# Altium PCB Печатная плата.PcbDoc
Units mm, origin at the board's own origin, x right, y up, seen from the top; angles counter-clockwise.
Board outline 40 x 40 mm, 4 copper layers (Top Layer 1, 15v, GND, Bottom Layer 1), stack 0.91 mm thick; 3 components, 12 nets, 42 pads, 1 vias.
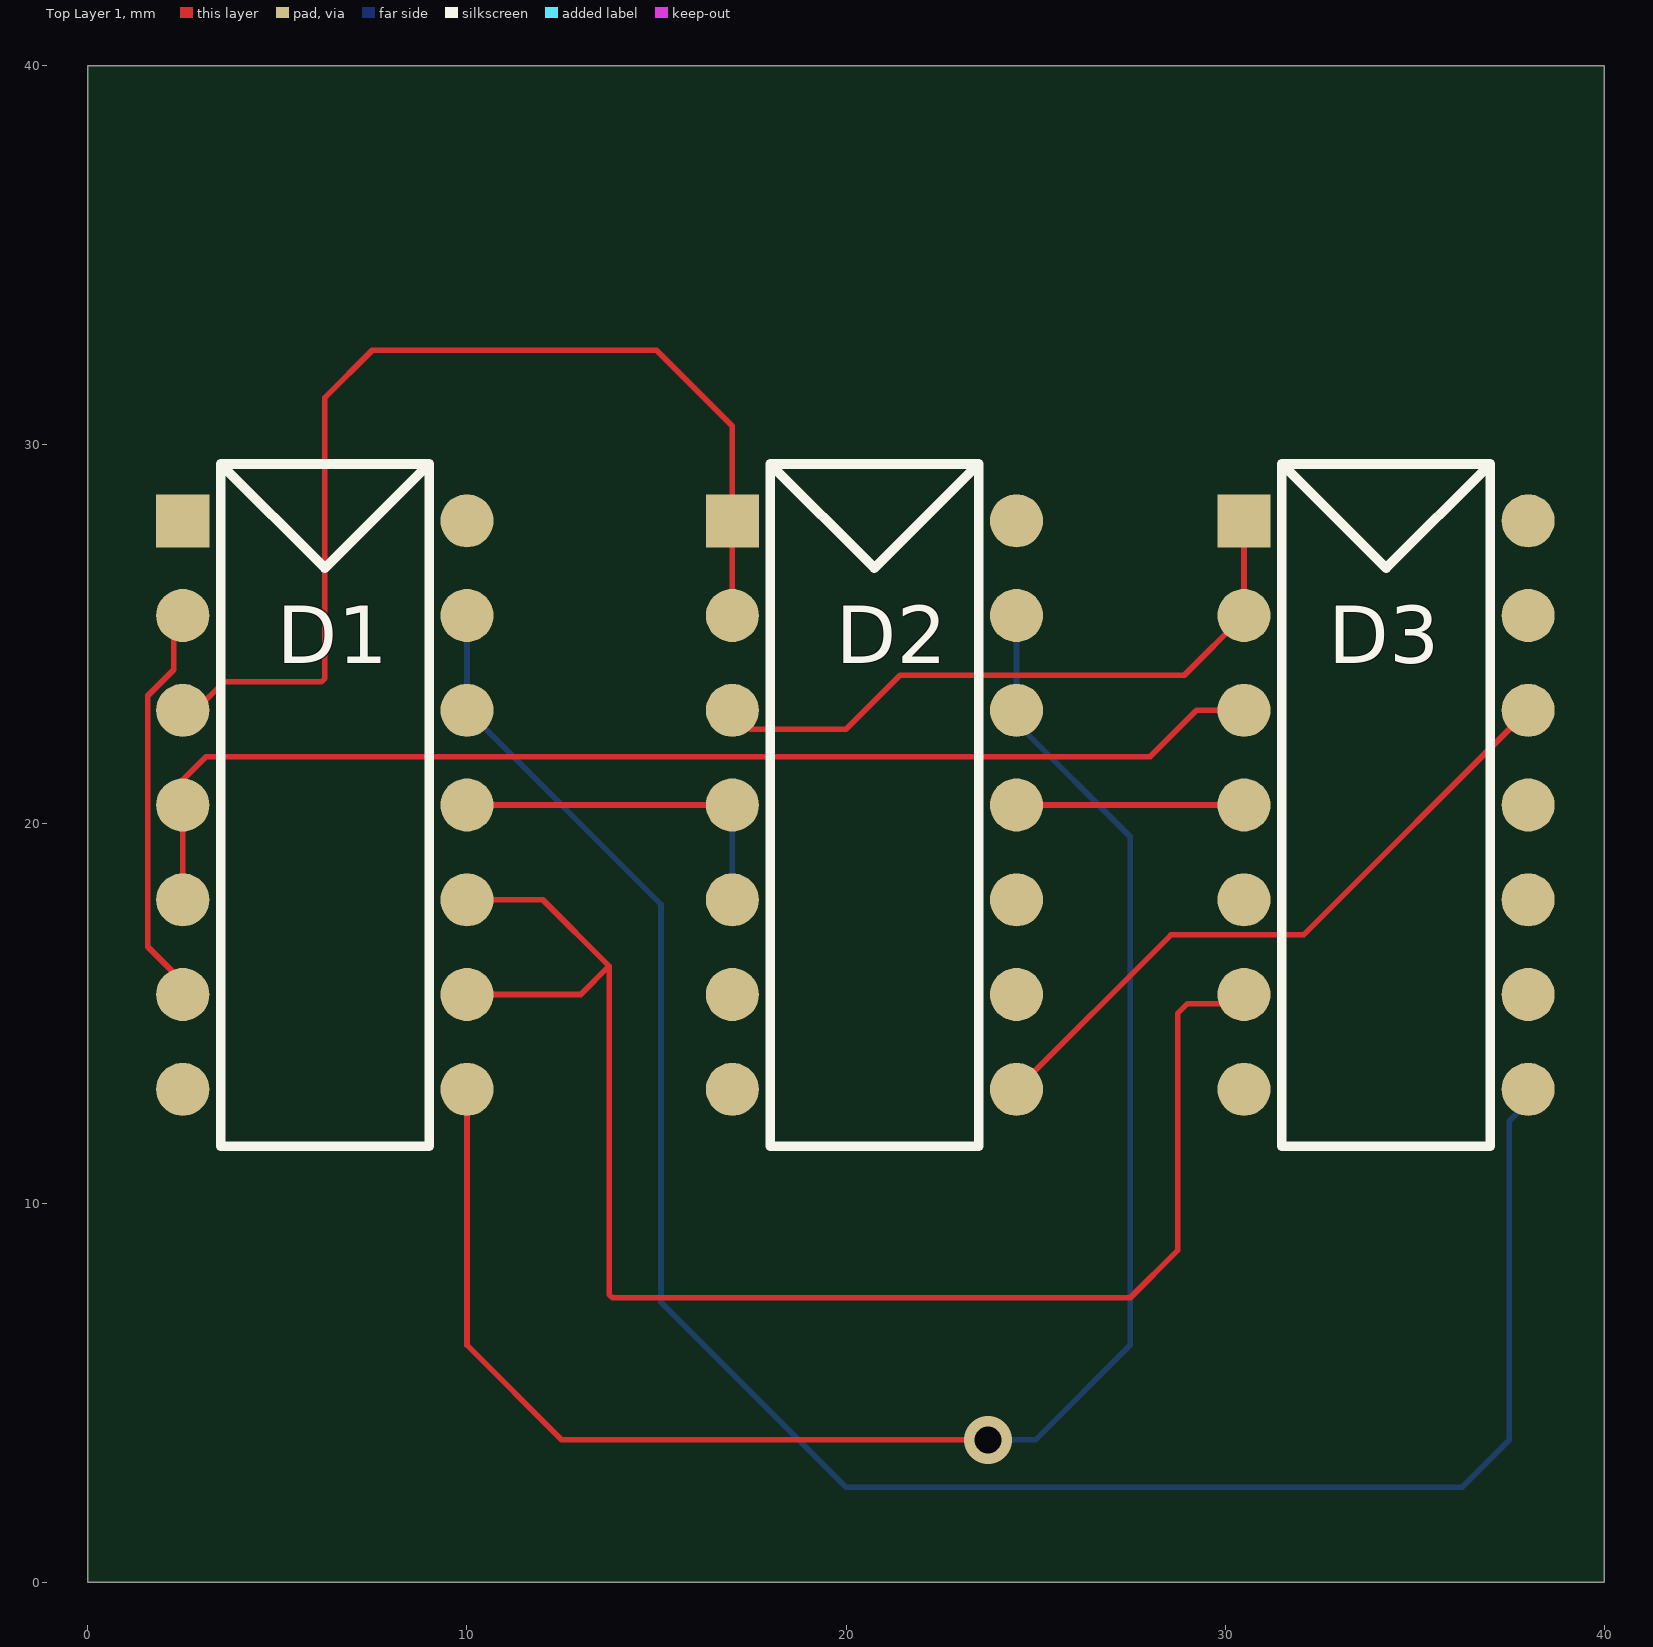
[diagram p0: Top Layer 1 view]
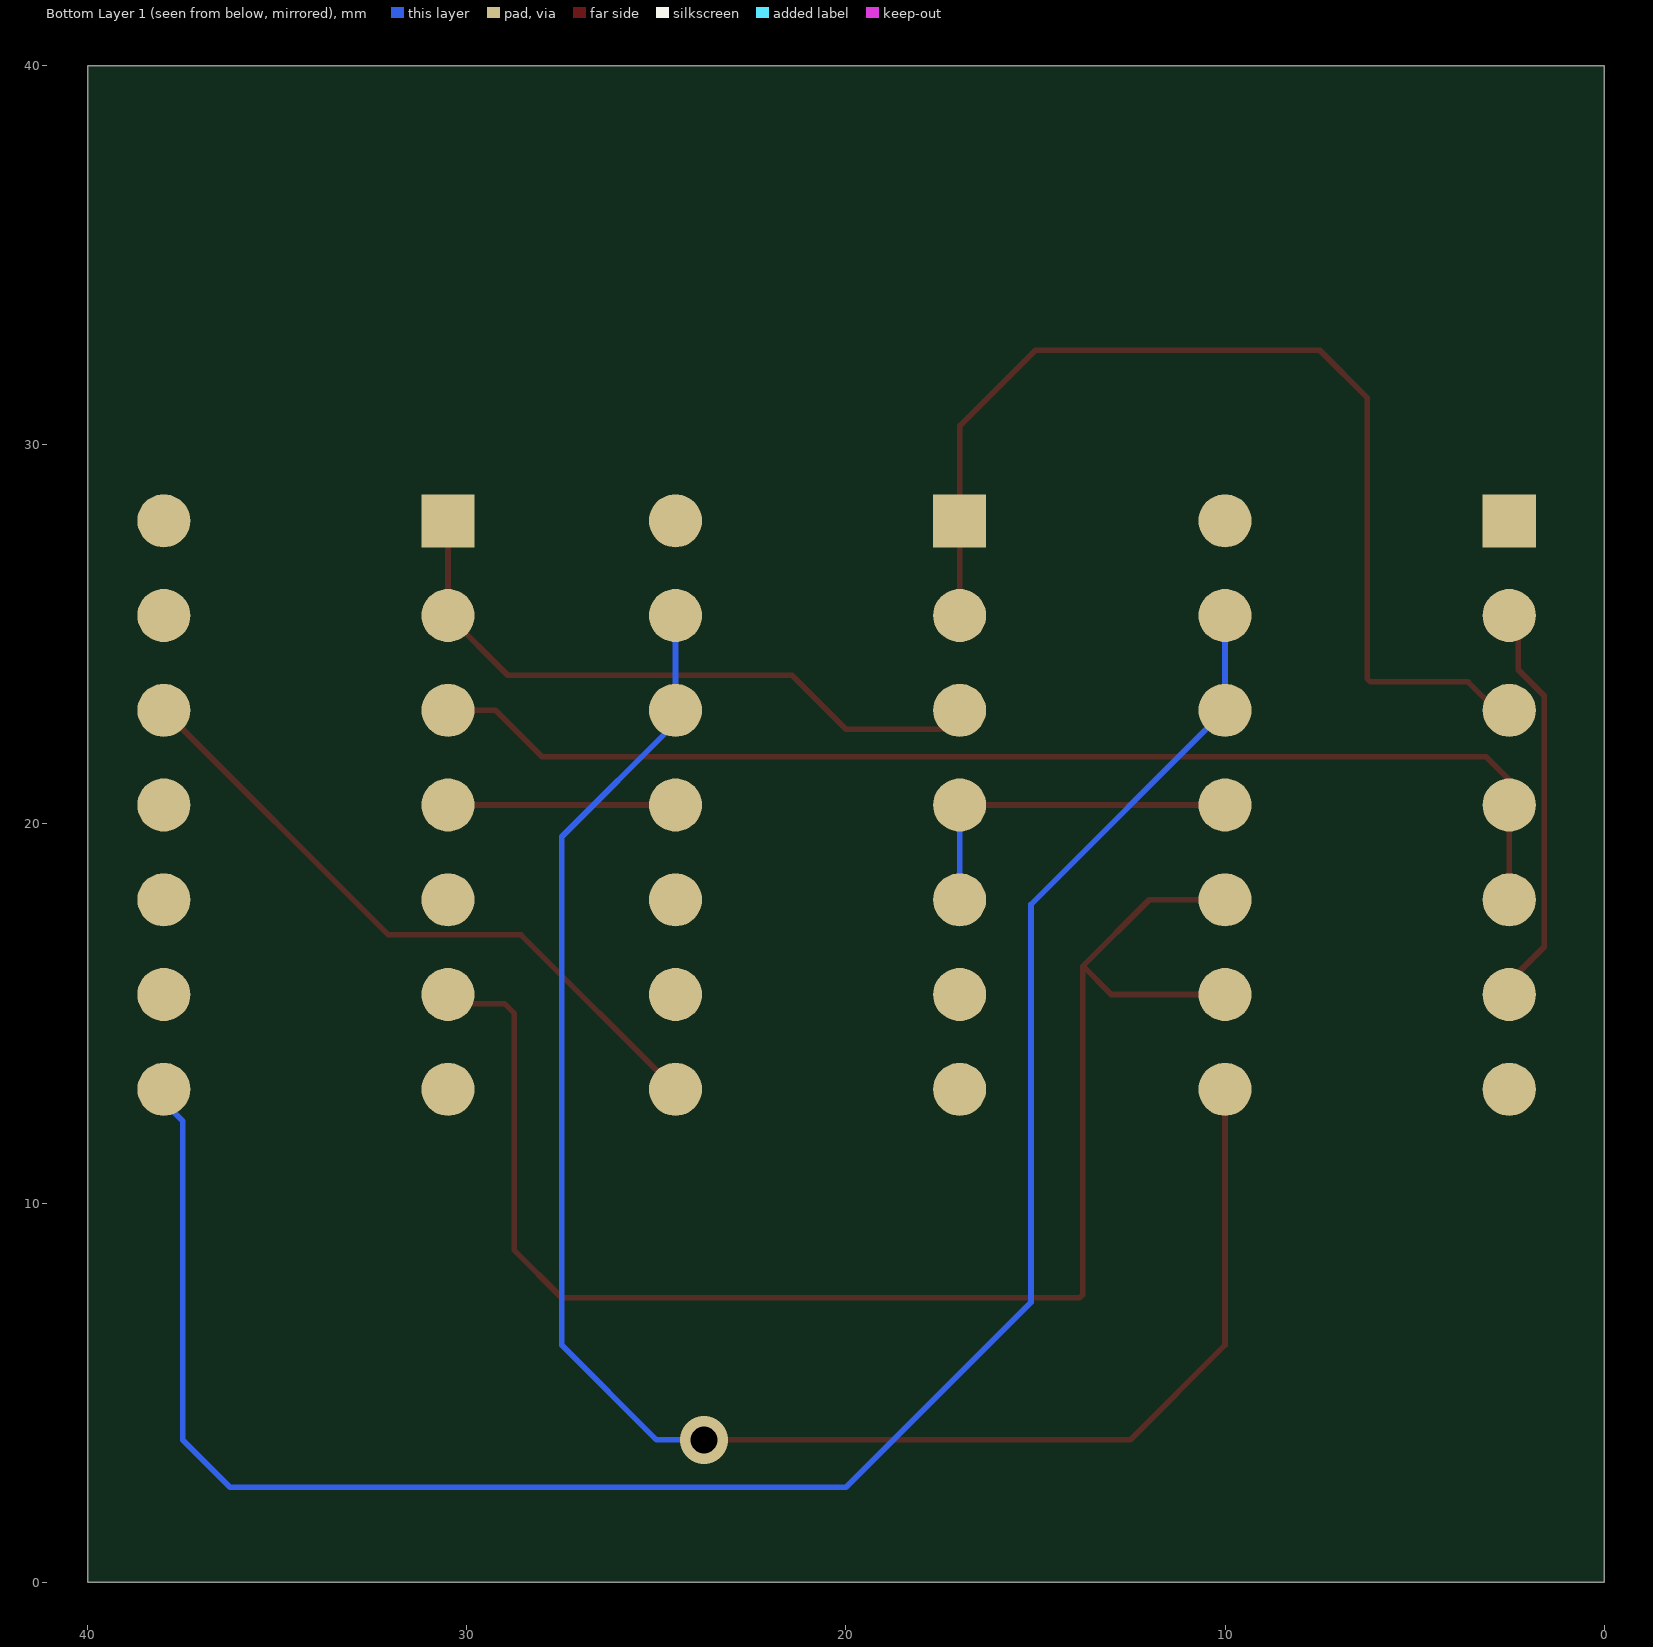
[diagram p1: Bottom Layer 1 view, seen from below]
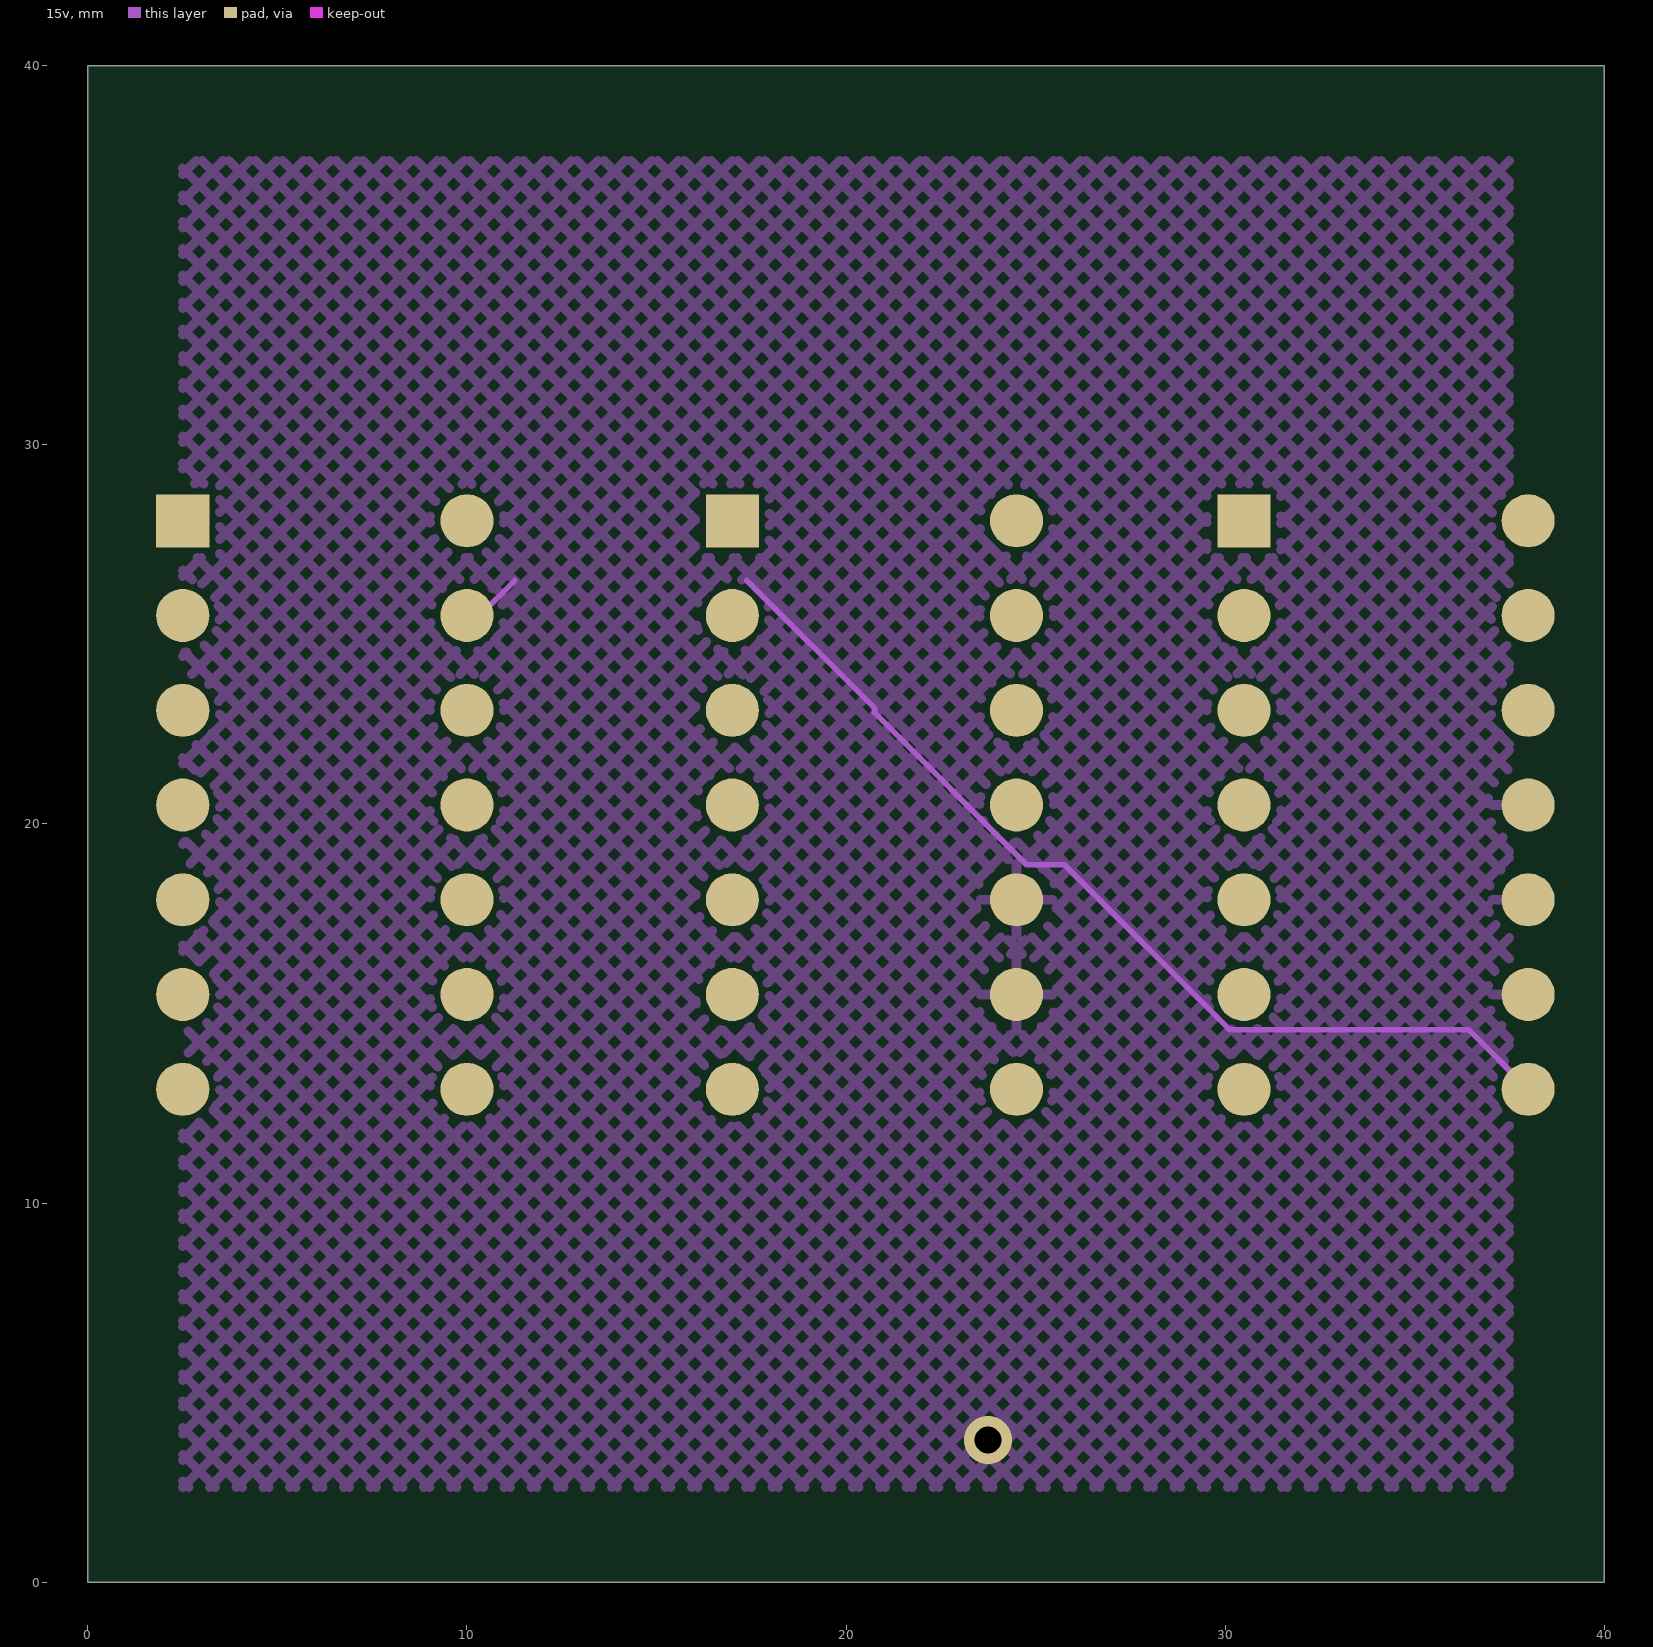
[diagram p2: 15v]
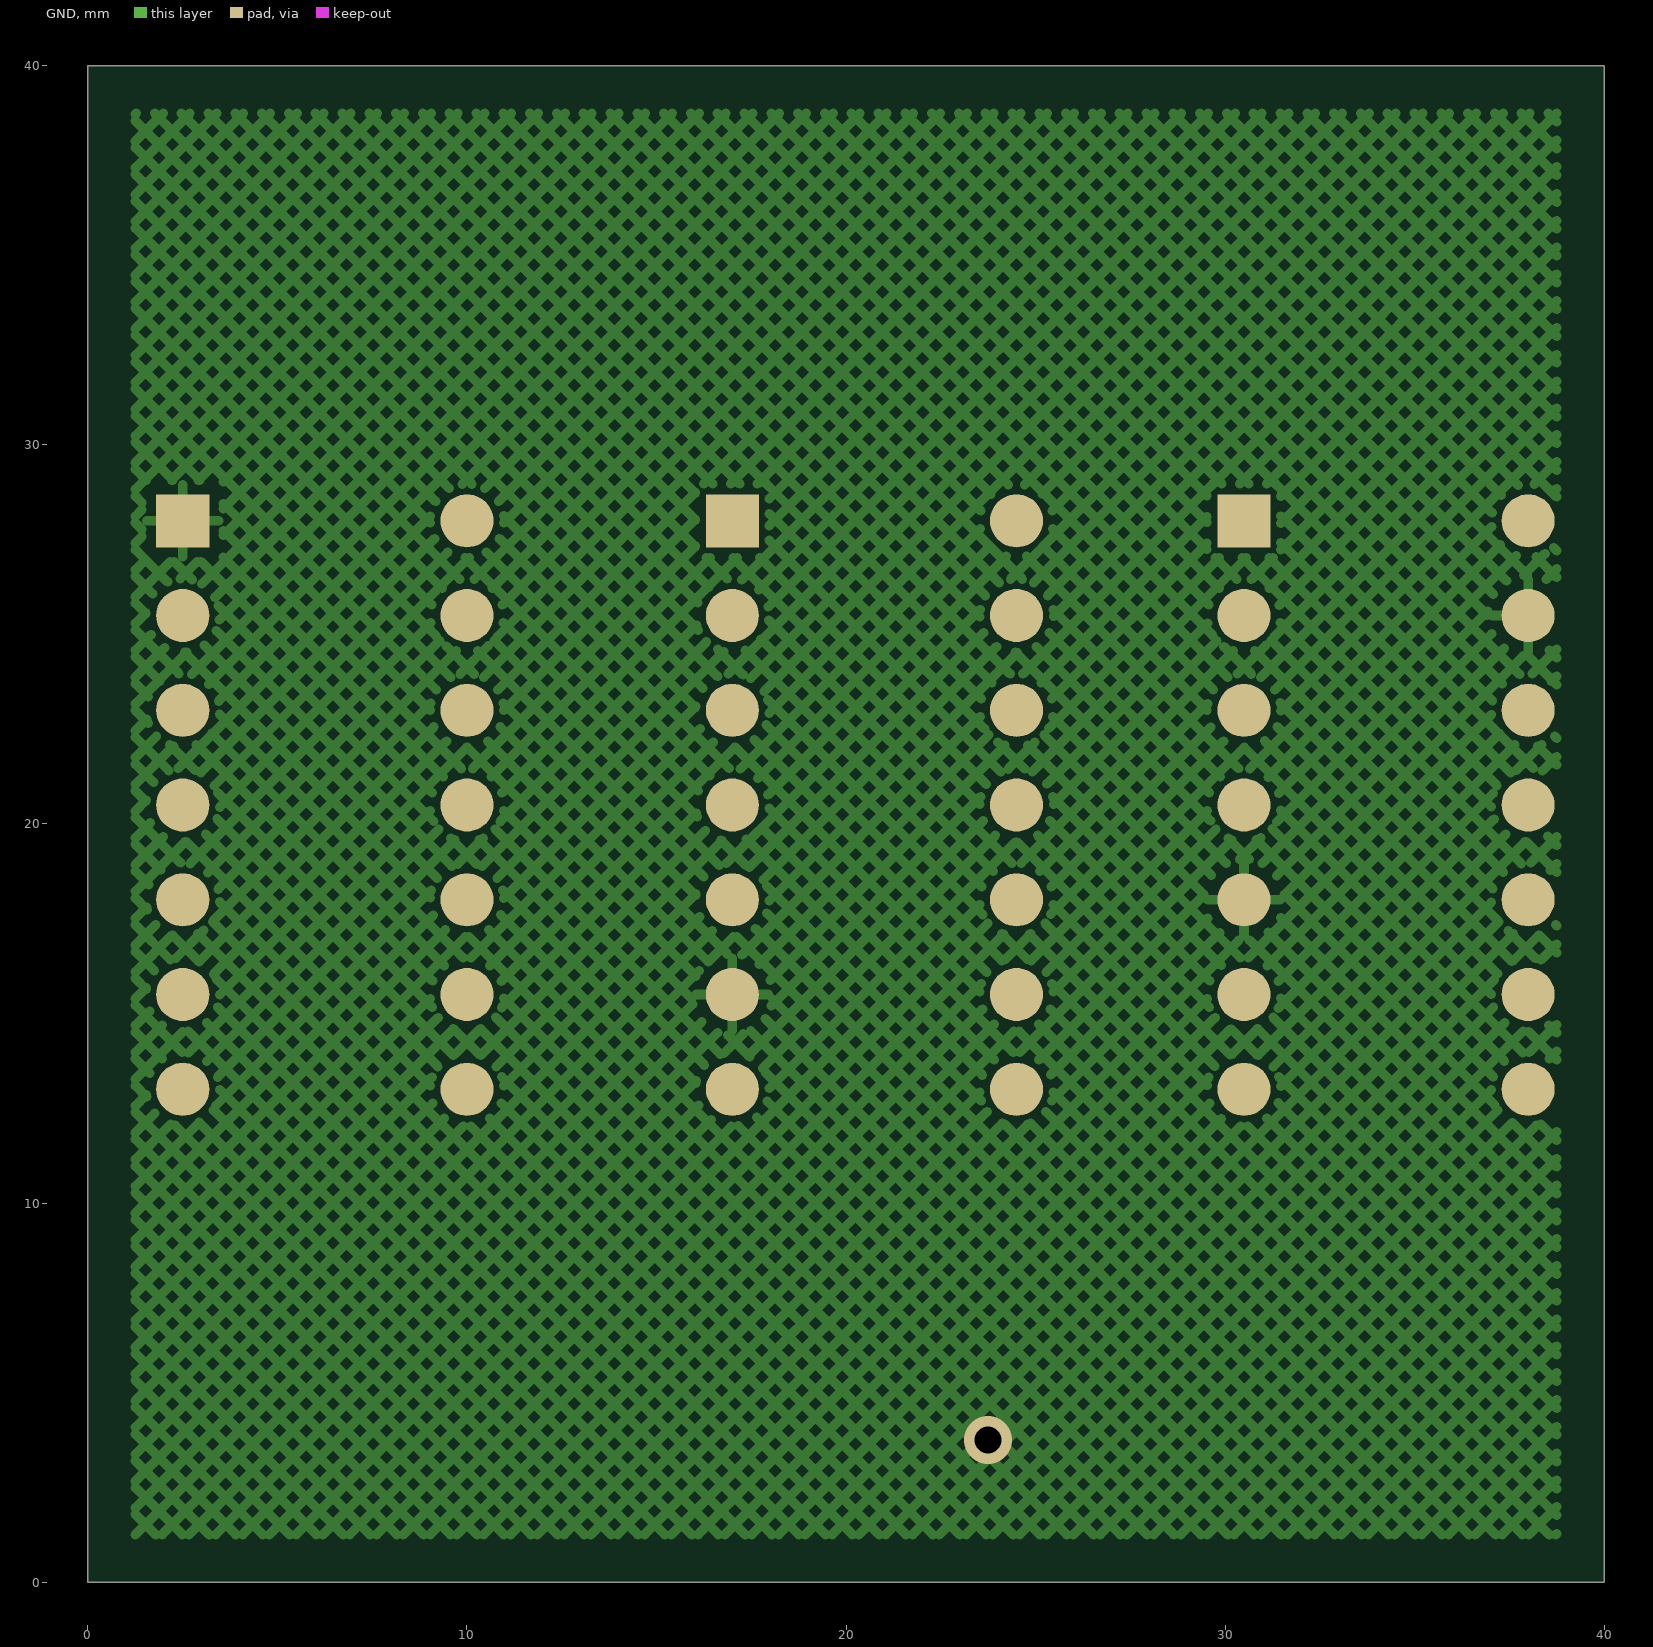
[diagram p3: GND]

## Layer stack, top to bottom
Top Solder: solder mask 0.03, Solder Resist, Dk 3.5
Top Layer 1: signal copper 0.035
Dielectric 2: prepreg 0.13, PP-006, Dk 4.2
15v: signal copper 0.035
Core: dielectric 0.51, FR-4, Dk 4.2
GND: signal copper 0.035
Dielectric 3: prepreg 0.13, PP-006, Dk 4.2
Bottom Layer 1: signal copper 0.035
Bottom Solder: solder mask 0.03, Solder Resist, Dk 3.5

## Board outline
0,0 0,40 40,40 40,0

## Design rules (kind name [scope] priority, off if disabled: settings)
Clearance [All] p1: gap=0.15 ignorepadtopadclearanceinfootprint=FALSE except(0: Arc-Hole Track-Hole SMDPad-Hole THPad-Hole Via-Hole Fill-Hole Poly-Hole Region-Hole Text-Hole)
PasteMaskExpansion [All] p1: expansion=0.05
PlaneClearance [All] p1: clearance=0.6
PlaneConnect [All] p1: planeconnectstyle=Relief reliefexpansion=0.25 reliefentries=4 reliefconductorwidth=0.6 reliefairgap=0.3
PolygonConnect [All] p1: connectstyle=Relief reliefconductorwidth=0.254 reliefentries=4 polygonreliefangle="90 Angle" airgapwidth=0.25
RoomDefinition "Принципиальная электрическая схема" [InComponentClass('Принципиальная электрическая схема')] p1: confinementstyle=ConfineIn formatcopy=TRUE lockcomponents=FALSE outline 0,0 40,0 40,40 0,40
RoutingCorners [All] p1: cornerstyle=45-Degree minsetback=3 maxsetback=3
RoutingLayers [All] p1: top layer_v5=FALSE mid layer 1_v5=TRUE mid layer 2_v5=TRUE bottom layer_v5=FALSE
RoutingVias [All] p1: holewidth=0.6 width=1.2 viastyle="Through Hole" minholewidth=0.6 minwidth=1.2 maxholewidth=0.6 maxwidth=1.2
SMDToCorner [All] p1: distance=393701
SMDToPlane [All] p1: distance=393701
SolderMaskExpansion [All] p1: expansion=0.1 istentingtop=FALSE
Width [All] p1: maxlimit=0.15 minlimit=0.15 preferedwidth=0.15 minimp=50.000000 maximp=50.000000 favimp=50.000000
25 further rules are at their usual default settings.

## Classes and differential pairs
net class "BAS [1..10]": "BAS 1" "BAS 2" "BAS 3" "BAS 4" "BAS 5" "BAS 6" "BAS 7" "BAS 8" "BAS 9" "BAS 10"

## Components (designator, comment, footprint, x,y, rotation, side; value= is the part's Value field where it differs from the comment)
D1 "НЕ-И" DIP14 2.5,28 r0 top
D2 "НЕ-И" DIP14 17,28 r0 top
D3 "НЕ-И" DIP14 30.5,28 r0 top

## Footprints (in the part's own frame and the unit in brackets; to place one, negate y for a bottom-side part, rotate by r counter-clockwise, add the part's x,y. Pads: shape width x height; smd on the part's side, far side on the other; paste and mask are expansions set on the pad)
DIP14 [mm] "К511ПУ2"
  rect 1.4x1.4 all layers, no hole mask+0.1: 1(0,0)
  round 1.4 all layers, no hole mask+0.1: 2(0,-2.5) 3(0,-5) 4(0,-7.5) 5(0,-10) 6(0,-12.5) 7(0,-15) 8(7.5,-15) 9(7.5,-12.5) 10(7.5,-10) 11(7.5,-7.5) 12(7.5,-5) 13(7.5,-2.5) 14(7.5,0)
  silkscreen extent 1,-16.5 6.5,1.5

## Via types
v1: diameter 1.27, hole 0.711, Top Layer 1 to Bottom Layer 1, 1 vias

## Nets (pads, with @x,y where several pads share a name; then routed paths per layer and width w, separated by ;. In a path a pad name is that pad's centre, name@x,y a point inside that pad or via, vN(x,y) a via of type N, cw(c..) or ccw(c..) an arc to the next point about the centre after c; other vN are vias at no path point)
1: D1.4 D1.5 D3.3 | length 31.9
  Top Layer 1 w0.15: D1.5 2.5,21.162 3.113,21.775 28.025,21.775 29.25,23 D3.3
2: D1.9 D1.10 D3.6 | length 41
  Top Layer 1 w0.15: D1.9 13,15.5 13.75,16.25 ; D1.10 12,18 13.75,16.25 ; D3.6 30.261,15.261 29.011,15.261 28.75,15 28.75,8.75 27.5,7.5 13.838,7.5 13.75,7.588 13.75,16.25
3: D2.9 D2.10 D3.9 D3.10 D3.11
5: D1.1 D2.6 D3.5 D3.13
NetD1_2: D1.2 D1.6 | length 10.8
  Top Layer 1 w0.15: D1.6 2.5,15.838 1.575,16.763 1.575,23.383 2.261,24.069 2.261,25.261 D1.2
NetD1_3: D1.3 D2.1 D2.2 | length 28.6
  Top Layer 1 w0.15: D1.3 2.838,23 3.588,23.75 6.162,23.75 6.25,23.838 6.25,31.25 7.5,32.5 15,32.5 17,30.5 D2.1 D2.2
NetD1_8: D1.8 D2.12 D2.13 | length 46.8
  Top Layer 1 w0.15: D1.8 10,6.25 12.5,3.75 v1(23.75,3.75)
  Bottom Layer 1 w0.15: v1(23.75,3.75) 25,3.75 27.5,6.25 27.5,19.662 24.5,22.662 D2.12 D2.13
NetD1_11: D1.11 D2.4 D2.5 | length 9.5
  Top Layer 1 w0.15: D1.11 D2.4
  Bottom Layer 1 w0.15: D2.5 D2.4
NetD1_12: D1.12 D1.13 D3.8 | length 82.5
  15v w0.15: D1.13 10.338,25.5 11.263,26.425 ; 17.383,26.425 20.75,23.058 20.75,22.942 24.767,18.925 25.767,18.925 30.117,14.575 36.425,14.575 D3.8
  Bottom Layer 1 w0.15: D1.13 D1.12 15.12,17.88 15.12,7.38 20,2.5 36.25,2.5 37.5,3.75 37.5,12.162 38,12.662 D3.8
NetD2_3: D2.3 D3.1 D3.2 | length 17.4
  Top Layer 1 w0.15: D2.3 17.5,22.5 20,22.5 21.425,23.925 28.925,23.925 D3.2 D3.1
NetD2_8: D2.8 D3.12 | length 17.6
  Top Layer 1 w0.15: D2.8 28.575,17.075 32.075,17.075 D3.12
NetD2_11: D2.11 D3.4 | length 6
  Top Layer 1 w0.15: D2.11 D3.4
pads on no net: D1.7 D1.14 D2.7 D2.14 D3.7 D3.14

## Polygon pours and split planes (outlines as drawn)
5 on GND "GND" (hatched 45Degree grid 0.5 track 0.25, remove dead copper, pour order 1): 1.25,1.25 38.75,1.25 38.75,38.75 1.25,38.75
3 on 15v "15V" (hatched 45Degree grid 0.5 track 0.25, remove dead copper, pour order 0): 2.5,2.5 2.5,37.5 37.5,37.5 37.5,2.5

## Silkscreen, mask and mechanical layers (free items; w line width, h text height)
Mechanical 1:
  the board outline again, w0.254

## Dimensions
40,40 to 40,0 on Mechanical 1
40,0 to 0,0 on Mechanical 1